# Altium PCB LM75B_NXP1.PcbDoc
Units mm, origin at the board's own origin, x right, y up, seen from the top; angles counter-clockwise.
Board outline 28 x 12 mm, 2 copper layers (Top Layer, Bottom Layer); 13 components, 8 nets, 44 pads, 17 vias.
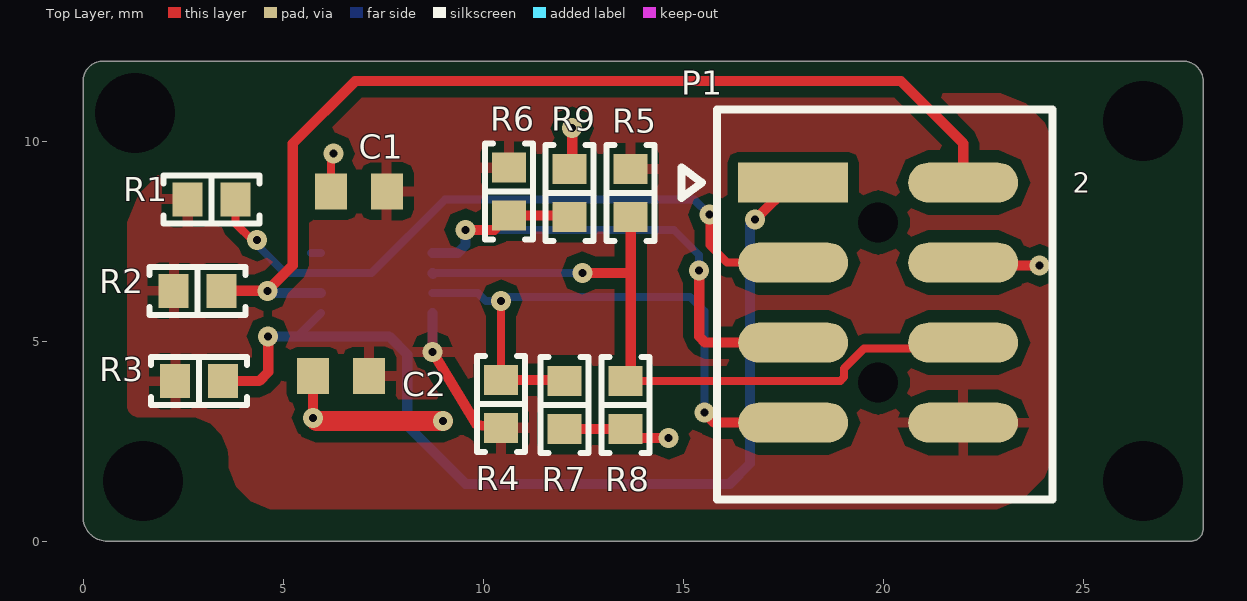
[diagram p0: Top Layer view]
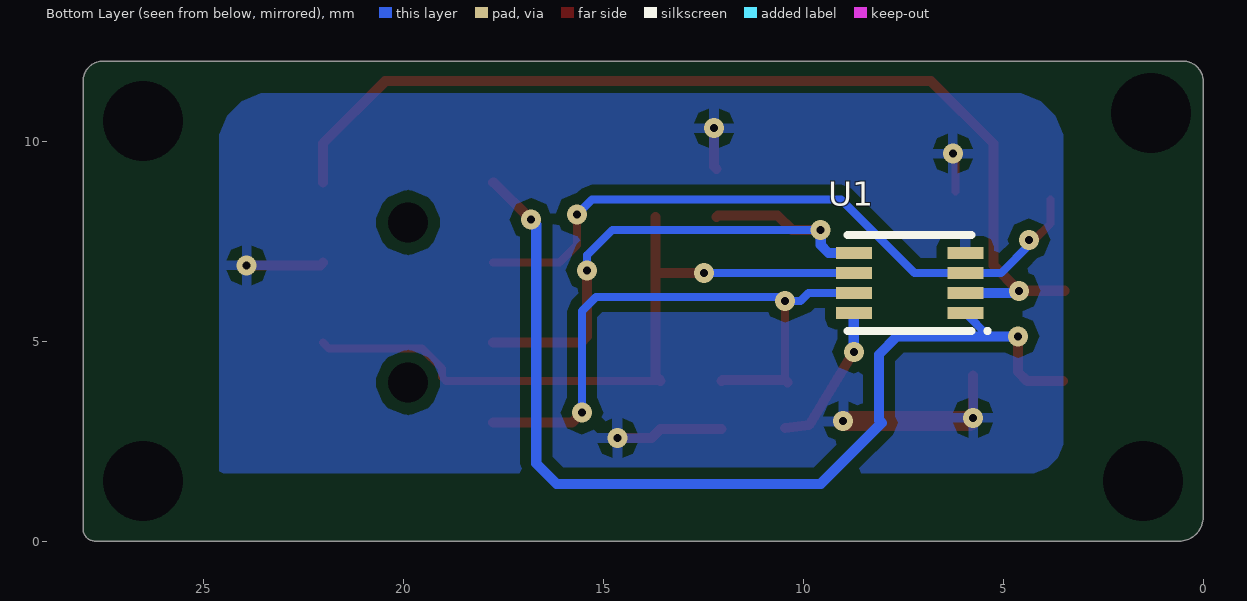
[diagram p1: Bottom Layer view, seen from below]
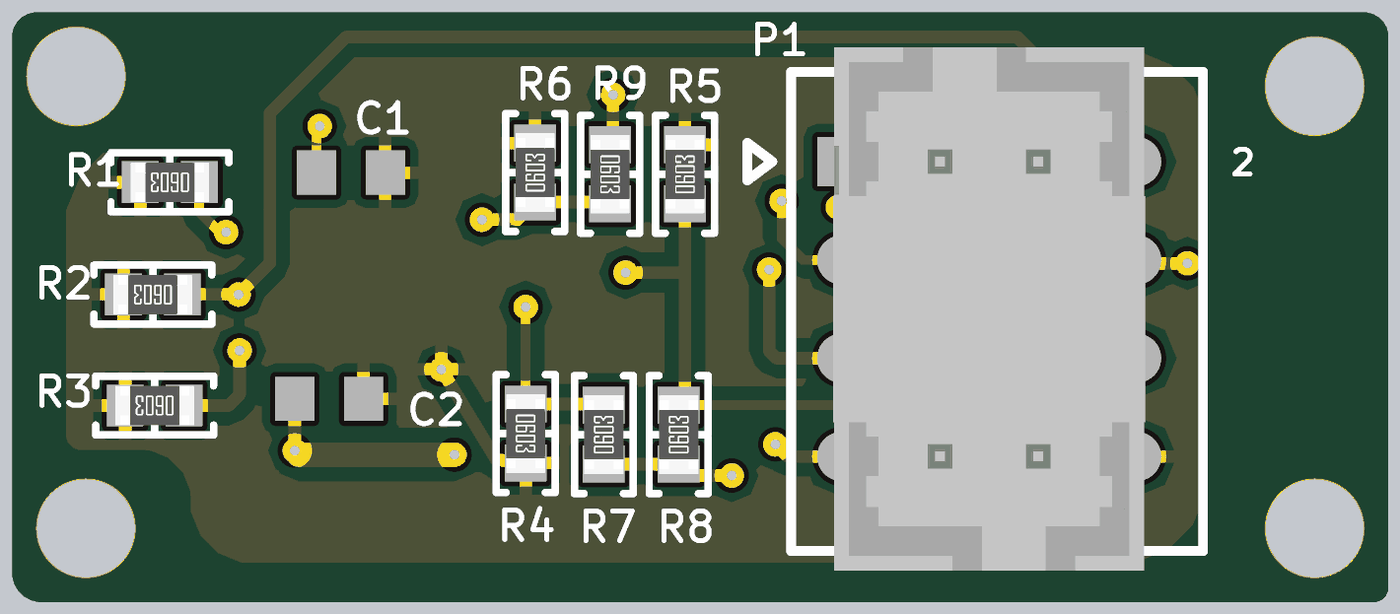
[diagram p2: 3D render of the assembled board from above, using the file's embedded part models]

## Layer stack, top to bottom
Top Solder: solder mask 0.0102, Solder Resist, Dk 3.5
Top Layer: signal copper 0.0356
Dielectric 1: dielectric 0.32, FR-4, Dk 4.8
Bottom Layer: signal copper 0.0356
Bottom Solder: solder mask 0.0102, Solder Resist, Dk 3.5

## Board outline
0,11.5 cw(c0.5,11.5) 0.5,12 27.5,12 cw(c27.5,11.5) 28,11.5 28,0.3 cw(c27.7,0.3) 27.7,0 0.6,0 cw(c0.6,0.6) 0,0.6

## Design rules (kind name [scope] priority, off if disabled: settings)
Clearance [All] p1: gap=0.254 ignorepadtopadclearanceinfootprint=FALSE except(0: Arc-Hole Track-Hole SMDPad-Hole THPad-Hole Via-Hole Fill-Hole Poly-Hole Region-Hole Text-Hole; 0.1: Arc-SMDPad Track-SMDPad SMDPad-SMDPad)
MinimumSolderMaskSliver [All] p1: minsoldermaskwidth=0.04
PolygonConnect [All] p1: connectstyle=Relief reliefconductorwidth=0.254 reliefentries=4 polygonreliefangle="90 Angle" airgapwidth=0.254
RoomDefinition LM75B [InComponentClass('LM75B')] p1: confinementstyle=ConfineIn formatcopy=TRUE lockcomponents=FALSE outline -0.789,-1.073 28.167,-1.073 28.167,12.538 -0.789,12.538
RoutingVias [All] p1: holewidth=0.2 width=0.5 viastyle="Through Hole" minholewidth=0.2 minwidth=0.5 maxholewidth=0.2 maxwidth=0.5
SilkToSilkClearance [All] p1: silktosilkclearance=0.1
SilkToSolderMaskClearance [IsPad] p1: minsilkscreentomaskgap=0.1 clearancetoexposedcopper=TRUE
SolderMaskExpansion [All] p1: expansion=0.102
Width [All] p1: maxlimit=1 minlimit=0.1 preferedwidth=0.2
27 further rules are at their usual default settings.

## Components (designator, comment, footprint, x,y, rotation, side; value= is the part's Value field where it differs from the comment)
C1 "105" 1608[0603] 6.893,8.741 r0 top value=100pF
C2 "105" 1608[0603] 6.45,4.134 r0 top value=100pF
P1 "87832-06" 87832-0806 17.753,8.963 r0 top
R1 "10k" "RES 0603/1608 RF" 3.21,8.544 r180 top value=1K
R2 "10k" "RES 0603/1608 RF" 2.864,6.258 r180 top value=1K
R3 "10k" "RES 0603/1608 RF" 2.9,4 r180 top value=1K
R4 "res(open)" "RES 0603/1608 RF" 10.449,3.429 r270 top value=1K
R5 "res(open)" "RES 0603/1608 RF" 13.689,8.706 r90 top value=1K
R6 "res(open)" "RES 0603/1608 RF" 10.641,8.741 r90 top value=1K
R7 "res(open)" "RES 0603/1608 RF" 12.038,3.407 r90 top value=1K
R8 "res(open)" "RES 0603/1608 RF" 13.562,3.407 r90 top value=1K
R9 "res(open)" "RES 0603/1608 RF" 12.165,8.706 r270 top value=1K
U1 "LM75B" SON50P300X50-8N 7.339,6.455 r0 bottom

## Footprints (in the part's own frame and the unit in brackets; to place one, negate y for a bottom-side part, rotate by r counter-clockwise, add the part's x,y. Pads: shape width x height; smd on the part's side, far side on the other; paste and mask are expansions set on the pad)
1608[0603] [mm] "Chip Capacitor, Body 1.6x0.8mm, IPC High Density"
  rect 0.8x0.9 smd: 1(-0.7,0) 2(0.7,0)
  body extent -0.87,-0.48 0.87,0.48, height 1.3
87832-0806 [mm]
  rect 2.75x1 smd: 1(0,0)
  oval 2.75x1 smd: 2(4.25,0) 3(0,-2) 4(4.25,-2) 5(0,-4) 6(4.25,-4) 7(0,-6) 8(4.25,-6)
  round 0 hole 1: H(2.125,-5) H(2.125,-1)
  silkscreen extent -2.79,-7.93 6.48,1.83, body extent -1.05,-8.33 5.3,2.32, height 9.05
"RES 0603/1608 RF" [mm] "Chip Resistor, 2-Leads, Body 1.60x0.80mm, IPC High Density"
  rect 0.75x0.85 smd: 1(-0.6,0) 2(0.6,0)
  silkscreen extent -1.2,-0.6 1.2,0.6, body extent -0.8,-0.4 0.8,0.4, height 0.45
SON50P300X50-8N [mm] "SON, 8-Leads, Body 2.00x3.00mm, Pitch 0.50mm, IPC Medium Density"
  rect 0.9x0.3 smd: 1(-1.395,0.75) 2(-1.395,0.25) 3(-1.395,-0.25) 4(-1.395,-0.75) 5(1.395,-0.75) 6(1.395,-0.25) 7(1.395,0.25) 8(1.395,0.75)
  silkscreen extent -2,-1.2 1.55,1.25, body extent -1.55,-1.05 1.55,1.05, height 0.5

## Part data
C1 C2: library part "Cap Semi", "Capacitor (Semiconductor SIM Model)", LatestRevisionDate=29-May-2009, LatestRevisionNote="IPC-7351 Footprint Added.", PackageDescription="Chip Capacitor", PackageReference=C1206, Published=8-Jun-2000, Publisher="Altium Limited"
P1: library part "Header 4X2", "Header, 4-Pin, Dual row", LatestRevisionDate=17-Jul-2002, LatestRevisionNote="Re-released for DXP Platform.", Publisher="Altium Limited"
R1 R2 R3 R4 R5 R6 R7 R8 R9: library part "Res Semi", "Semiconductor Resistor", LatestRevisionDate=17-Jul-2002, LatestRevisionNote="Re-released for DXP Platform.", PackageDescription="Axial Device, Thru-Hole; 2 Leads; 0.5 in Pin Spacing", PackageReference=AXIAL-0.5, Published=8-Jun-2000, Publisher="Altium Limited"

## Free pads (board coordinates)
  round 1.524 hole 2: hole(1.3,10.7) hole(1.5,1.5) hole(26.5,1.5) hole(26.5,10.5)

## Via types
v1: diameter 0.5, hole 0.2, Top Layer to Bottom Layer, 17 vias

## Nets (pads, with @x,y where several pads share a name; then routed paths per layer and width w, separated by ;. In a path a pad name is that pad's centre, name@x,y a point inside that pad or via, vN(x,y) a via of type N, cw(c..) or ccw(c..) an arc to the next point about the centre after c; other vN are vias at no path point)
A0: P1.7 R4.1 R7.2 U1.7 | length 15.6
  Top Layer w0.2: R4.1 v1(10.449,6.004)
  Top Layer w0.254: R4.1@10.392,3.972 R4.1 12.016,4.029 R7.2 ; v1(15.529,3.21) 15.776,2.963 P1.7
  Bottom Layer w0.2: U1.7 9.867,6.205 10.068,6.004 v1(10.449,6.004) 10.546,6.101 15.178,6.101 15.529,5.75 v1(15.529,3.21)
A1: P1.6 R5.1 R8.2 U1.6 | length 18.1
  Top Layer w0.2: R8.2 18.932,4.007 19.024,4.099 19.024,4.317 19.524,4.817 21.857,4.817 P1.6
  Top Layer w0.254: v1(12.481,6.705) 13.628,6.705 13.689,6.766 ; R8.2 13.689,4.134 13.689,6.766 ; R5.1 13.689,6.766
  Bottom Layer w0.2: U1.6 v1(12.481,6.705)
  Bottom Layer w0.254: U1.6@8.734,6.697 U1.6@8.745,6.686
A2: P1.5 R6.1 R9.2 U1.5 | length 14.7
  Top Layer w0.254: v1(9.56,7.782) 10.282,7.782 R6.1 12.13,8.141 R9.2 ; v1(15.402,6.766) 15.402,5.115 15.554,4.963 P1.5
  Bottom Layer w0.2: v1@9.444,7.755 9.471,7.782 v1(9.56,7.782) 14.767,7.782 15.402,7.147 v1(15.402,6.766)
  Bottom Layer w0.254: U1.5 9.364,7.205 9.56,7.401 v1(9.56,7.782)
GND: C1.1 C2.1 P1.4 R7.1 R8.1 R9.1 U1.4 | length 11.3
  Top Layer w0.2: C1.1 6.193,9.622 v1(6.258,9.687)
  Top Layer w0.254: C2.1 v1(5.75,3.083) ccw(c5.833,3.083) v1@5.833,3 ; R7.1 R8.1 13.794,2.575 v1(14.64,2.575) ; R9.1 12.227,9.368 v1(12.227,10.322) ; P1.4 22.073,6.893 v1(23.911,6.893)
  Top Layer w0.5: v1@5.833,3 v1(9,3)
  Bottom Layer w0.2: U1.4@5.692,7.205 U1.4
OS: P1.3 R1.1 U1.3 | length 17
  Top Layer w0.2: R1.1 3.81,7.944 4.226,7.528 v1(4.353,7.528) ; v1(15.656,8.163) 15.656,7.401 16.094,6.963 P1.3
  Bottom Layer w0.2: v1(4.353,7.528) 4.353,7.401 5.049,6.705 U1.3 7.213,6.705 9.052,8.544 15.275,8.544 v1(15.656,8.163)
SCL: P1.2 R2.1 U1.2 | length 25.5
  Top Layer w0.254: R2.1 v1(4.607,6.258) 5.242,6.893 5.242,9.941 6.801,11.5 20.447,11.5 22.003,9.944 P1.2
  Bottom Layer w0.254: v1(4.607,6.258) 4.66,6.205 U1.2
SDA: P1.1 R3.1 U1.1 | length 25.3
  Top Layer w0.254: R3.1 4.4,4 4.628,4.228 v1(4.628,5.119) ; v1(16.799,8.036) 17.726,8.963 P1.1
  Bottom Layer w0.1: v1(4.628,5.119) v1@4.628,5.136
  Bottom Layer w0.2: 5.358,5.119 U1.1
  Bottom Layer w0.254: v1(4.628,5.119) 5.358,5.119 7.651,5.119 8.103,4.667 8.103,3.023 8.036,2.956 9.56,1.432 16.164,1.432 16.672,1.94 16.672,7.909 v1(16.799,8.036)
VCC: C1.2 C2.2 P1.8 R1.2 R2.2 R3.2 R4.2 R5.2 R6.2 U1.8 | length 3.7
  Top Layer w0.254: v1(8.734,4.734) 9.484,3.501 9.849,2.9 R4.2
  Bottom Layer w0.254: v1(8.734,4.734) U1.8
pads on no net: P1.H

## Polygon pours and split planes (outlines as drawn)
GND on Bottom Layer "GNDBOT" (solid, pour order 0): 3.5,9.9 cw(c4.8,9.9) 4.8,11.2 23.3,11.2 cw(c23.3,9.9) 24.6,9.9 24.6,1.6 ccw(c24.5,1.6) 24.5,1.7 4.4,1.7 cw(c4.4,2.6) 3.5,2.6
VCC on Top Layer "VCCTOP" (solid, pour order 6): 1.1,7.6 cw(c3,7.6) 3,9.5 ccw(c3,10.6) 4.1,10.6 cw(c4.7,10.6) 4.7,11.2 22.6,11.2 cw(c22.6,9.5) 24.3,9.5 24.3,2.6 cw(c22.5,2.6) 22.5,0.8 4.927,0.8 cw(c4.927,2.09) 3.637,2.09 ccw(c2.627,2.09) 2.627,3.1 1.4,3.1 cw(c1.4,3.4) 1.1,3.4

## Silkscreen, mask and mechanical layers (free items; w line width, h text height)
Mechanical 1:
  the board outline again, w0.2

## Dimensions
26.5,1.5 to 26.5,10.5 on Mechanical 1
1.5,1.5 to 26.5,1.5 on Mechanical 1
0.5,12 to 0.6,0 on Mechanical 1
0,0.6 to 28,0.3 on Mechanical 13

## Text inside footprints (layer, text, board x,y; h text height)
P1: Top Overlay "2" at 24.738,8.709 h0.5